# Altium PCB PCB1.PcbDoc
Units mil, origin at the board's own origin, x right, y up, seen from the top; angles counter-clockwise.
Board outline 3040 x 2075 mil, 2 copper layers (Top Layer, Bottom Layer); 60 components, 45 nets, 259 pads, 23 vias.
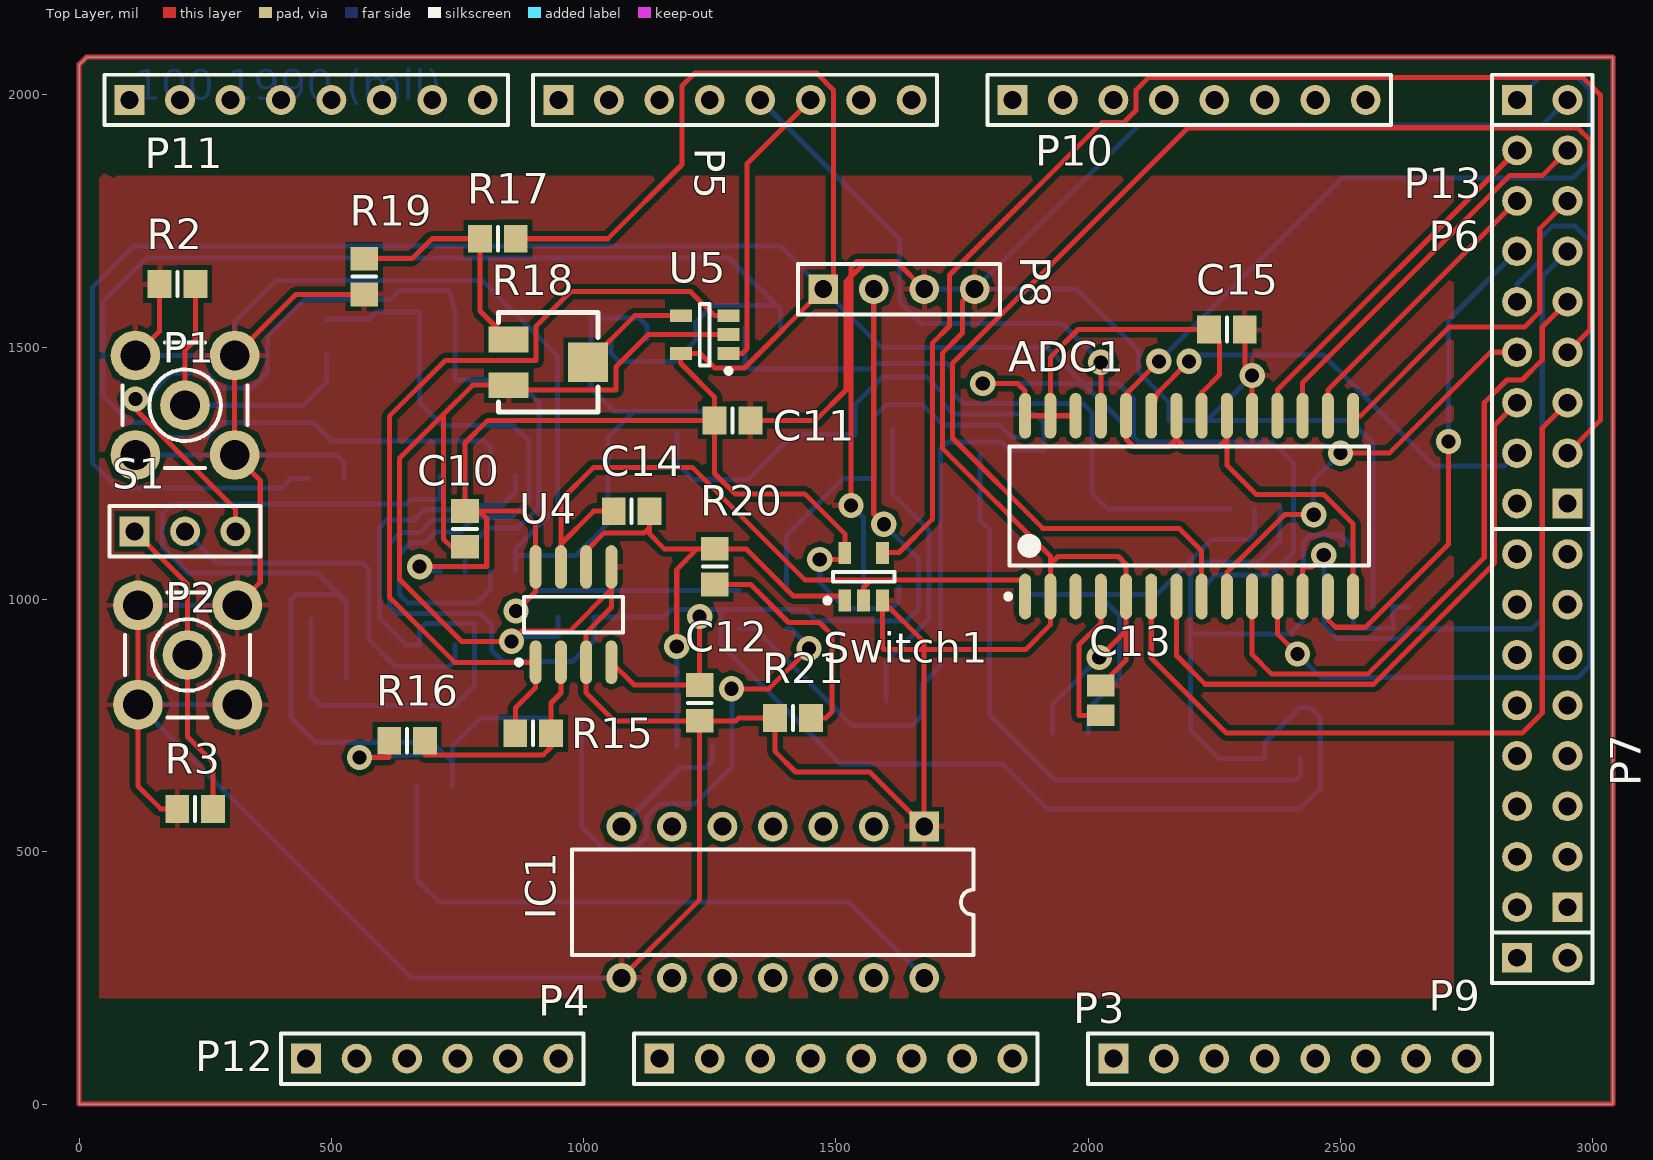
[diagram p0: Top Layer view]
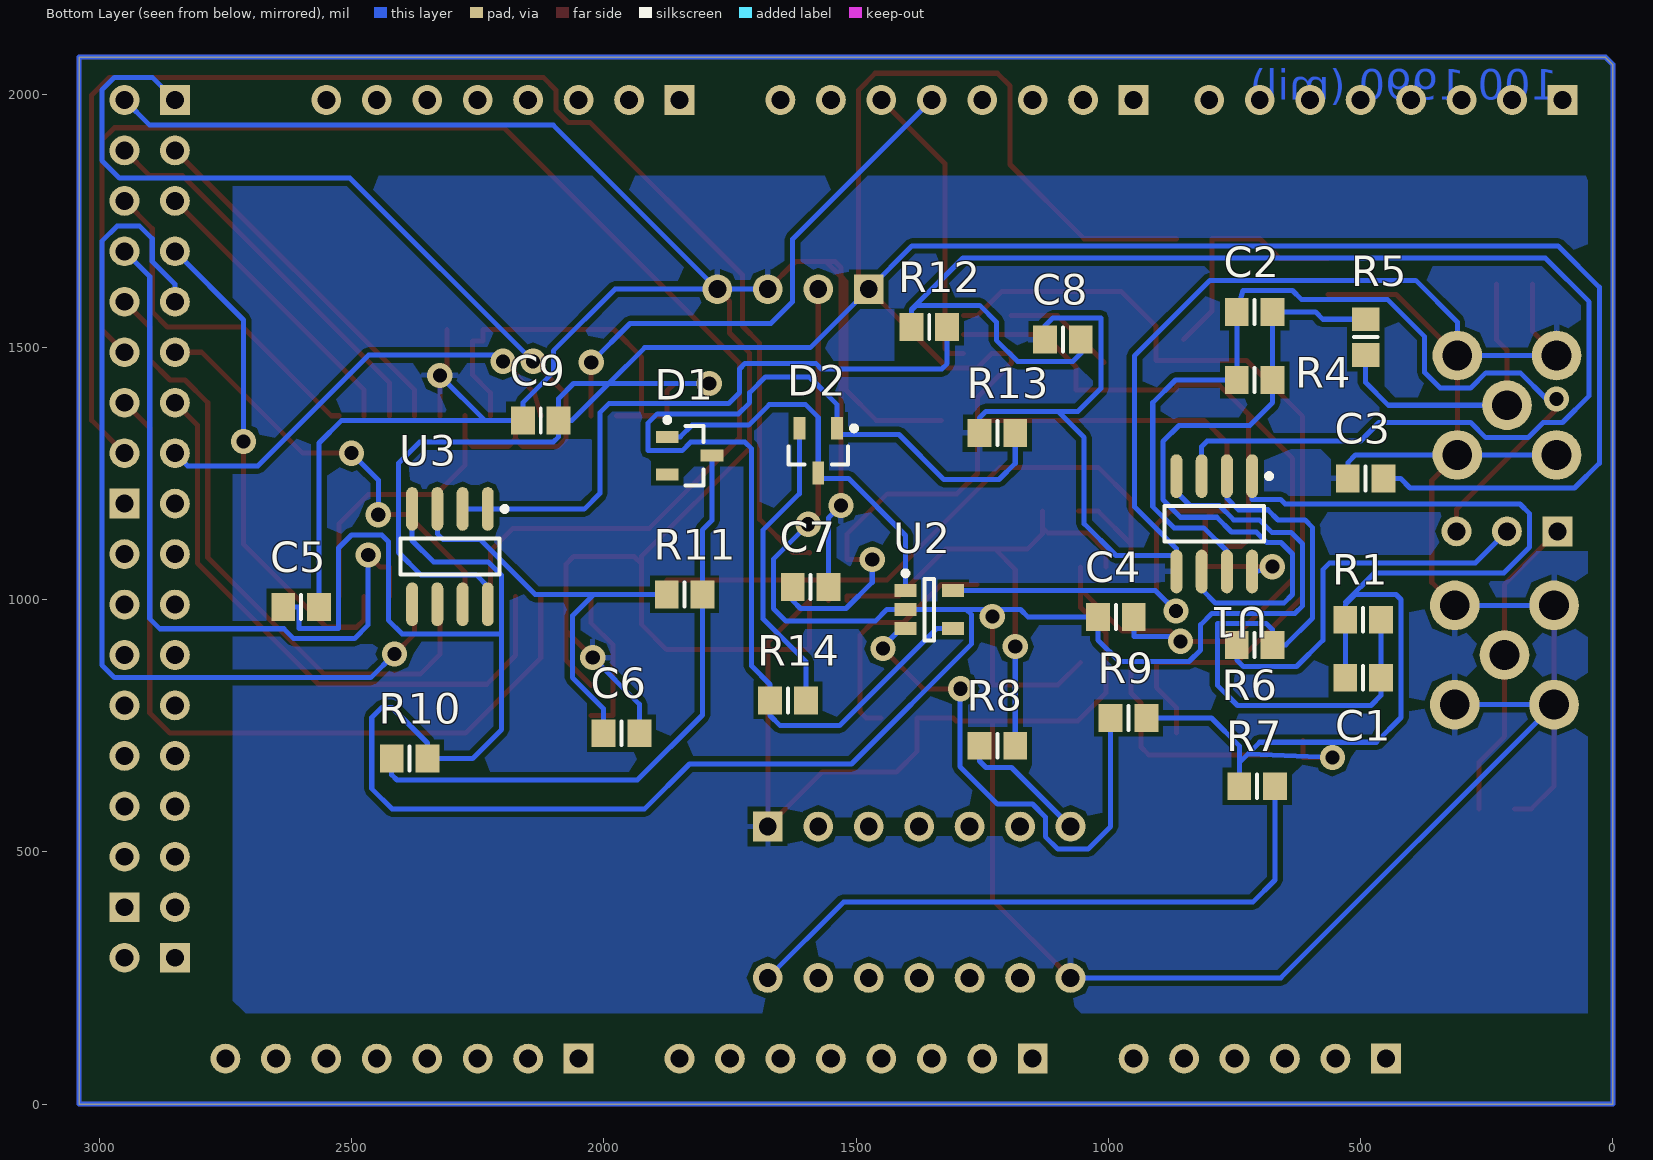
[diagram p1: Bottom Layer view, seen from below]

## Layer stack, top to bottom
Top Layer: signal copper 1.4
Dielectric: dielectric 12.6, FR-4, Dk 4.8
Bottom Layer: signal copper 1.4

## Board outline
0,0 0,2060 15,2075 3040,2075 3040,0

## Design rules (kind name [scope] priority, off if disabled: settings)
Clearance [All] p1: gap=10
PolygonConnect [All] p1: connectstyle=Relief reliefconductorwidth=10 reliefentries=4 polygonreliefangle="90 Angle"
RoomDefinition Sheet2 [InComponentClass('Sheet2')] p1: confinementstyle=ConfineIn formatcopy=TRUE lockcomponents=FALSE outline 0,0 3040,0 3040,2055 0,2055
RoomDefinition Sheet1 [InComponentClass('Sheet1')] p2: confinementstyle=ConfineIn formatcopy=TRUE lockcomponents=FALSE outline 0,0 3035,0 3035,2070 0,2070
RoutingTopology [InNetClass('digital')] p1: topology=Shortest
RoutingVias [All] p1: holewidth=28 width=50 viastyle="Through Hole" minholewidth=28 minwidth=50 maxholewidth=28 maxwidth=50
SilkscreenOverComponentPads [All] p1: minsilkscreentomaskgap=10
SolderMaskExpansion [All] p1: expansion=4
Width [All] p1: maxlimit=10 minlimit=10 preferedwidth=10
26 further rules are at their usual default settings.

## Classes and differential pairs
net class analog: NetADC1_1 NetADC1_4 NetC1_1 NetC1_2 NetC2_1 NetC2_2 NetC14_1 NetP1_1 NetP2_1 NetR6_1 NetR15_2 NetR17_2 NetR18_W
component class Sheet2: ADC1 C13 C14 C15 P3 P4 P5 P6 P7 P8 P9 P10 P11 P12 P13 R20 R21 Switch1
net class potencia: +5 -5 GND
net class digital: DGND NetADC1_6 NetADC1_7 NetADC1_8 NetADC1_9 NetADC1_10 NetADC1_11 NetADC1_12 NetADC1_13 NetADC1_15 NetADC1_16 NetADC1_17 NetADC1_18 NetADC1_23 NetADC1_25 NetP13_3
component class Sheet1: C1 C2 C3 C4 C5 C6 C7 C8 C9 C10 C11 C12 D1 D2 IC1 P1 P2 R1 R2 R3 R4 R5 R6 R7 R8 R9 R10 R11 R12 R13 R14 R15 R16 R17 R18 R19 S1 U1 U2 U3 U4 U5 V1 V2

## Components (designator, comment, footprint, x,y, rotation, side; value= is the part's Value field where it differs from the comment)
ADC1 "LTC1415" SO28_N 2200,1185 r90 top
C1 "Cap" 6-0805_N 495,845 r0 bottom
C2 "Cap" 6-0805_N 710,1570 r0 bottom
C3 "Cap" 6-0805_N 490,1240 r180 bottom
C4 "Cap" 6-0805_N 985,965 r180 bottom
C5 "Cap" 6-0805_N 2600,985 r180 bottom
C6 "Cap" 6-0805_N 1965,735 r180 bottom
C7 "Cap" 6-0805_N 1590,1025 r180 bottom
C8 "Cap" 6-0805_N 1090,1515 r0 bottom
C9 "Cap" 6-0805_N 2125,1355 r180 bottom
C10 "Cap" 6-0805_N 765,1140 r90 top
C11 "Cap" 6-0805_N 1295,1355 r0 top
C12 "Cap" 6-0805_N 1230,795 r270 top
C13 "Cap Pol3" C0805 2025,800 r90 top
C14 "Cap" 6-0805_N 1095,1175 r180 top
C15 "Cap" 6-0805_N 2275,1535 r0 top
D1 "Puente_Diodos" SOT-23B_N 1830,1285 r180 bottom
D2 "Puente_Diodos" SOT-23B_N 1575,1295 r270 bottom
IC1 "L33_134" DIP14 1375,400 r180 top
P1 "SMB" SMB_V-RJ45 210,1385 r0 top
P2 "SMB" SMB_V-RJ45 215,890 r0 top
P3 "Header 8" HDR1X8 2050,90 r0 top
P4 "Header 8" HDR1X8 1150,90 r0 top
P5 "Header 8" HDR1X8 950,1990 r0 top
P6 "Header 2" HDR1X2 2850,1990 r0 top
P7 "Header 8X2" HDR2X8 2950,390 r90 top
P8 "Header 4" HDR1X4 1475,1615 r0 top
P9 "Header 2" HDR1X2 2850,290 r0 top
P10 "Header 8" HDR1X8 1850,1990 r0 top
P11 "Header 8" HDR1X8 100,1990 r0 top
P12 "Header 6" HDR1X6 450,90 r0 top
P13 "Header 8X2" HDR2X8 2950,1190 r90 top
R1 "Res3" 6-0805_N 495,960 r0 bottom
R2 "Res3" 6-0805_N 195,1625 r0 top
R3 "Res3" 6-0805_N 230,585 r0 top
R4 "Res3" 6-0805_N 710,1435 r180 bottom
R5 "Res3" 6-0805_N 490,1520 r270 bottom
R6 "Res3" 6-0805_N 710,910 r180 bottom
R7 "Res3" 6-0805_N 705,630 r180 bottom
R8 "Res3" 6-0805_N 1220,710 r180 bottom
R9 "Res3" 6-0805_N 960,765 r180 bottom
R10 "Res3" 6-0805_N 2385,685 r180 bottom
R11 "Res3" 6-0805_N 1840,1010 r180 bottom
R12 "Res3" 6-0805_N 1355,1540 r180 bottom
R13 "Res3" 6-0805_N 1220,1330 r180 bottom
R14 "Res3" 6-0805_N 1635,800 r0 bottom
R15 "Res3" 6-0805_N 900,735 r180 top
R16 "Res3" 6-0805_N 650,720 r0 top
R17 "Res3" 6-0805_N 830,1715 r180 top
R18 "RPot SM" POT4MM-2 930,1470 r0 top
R19 "Res3" 6-0805_N 565,1640 r90 top
R20 "Res3" 6-0805_N 1260,1065 r90 top
R21 "Res3" 6-0805_N 1415,765 r0 top
S1 "SW-SPDT" HDR1X3 110,1135 r0 top
Switch1 "SN74LVC1G66DBVR" SOT23-5_N 1555,1045 r90 top
U1 "THS4062" S8_N 790,1150 r270 bottom
U2 "ADCMP600" SOT23-5_N 1355,980 r180 bottom
U3 "TL062CD" S8_N 2305,1085 r270 bottom
U4 "THS4062" S8_N 980,970 r90 top
U5 "ADCMP600" SOT23-5_N 1240,1525 r180 top

## Footprints (in the part's own frame and the unit in brackets; to place one, negate y for a bottom-side part, rotate by r counter-clockwise, add the part's x,y. Pads: shape width x height; smd on the part's side, far side on the other; paste and mask are expansions set on the pad)
6-0805_N [mm] "Chip Resistor, Body 2.0x1.2mm, IPC Medium Density"
  rect 1.2x1.4 smd: 1(-0.9,0) 2(0.9,0)
  silkscreen extent 0,-0.6 0,0.6, body extent -1.07,-0.7 1.07,0.7, height 0.7
C0805 [mm] "Chip Capacitor, Body 2.0x1.3mm, IPC High Density"
  rect 1.1x1.4 smd: 1(-0.75,0) 2(0.75,0)
  body extent -1.1,-0.72 1.1,0.72, height 1.4
DIP14 [mm] "DIP; 14 Leads; Row Spacing 7.62 mm; Pitch 2.54 mm"
  rect 1.5x1.5 hole 0.9: 1(-7.62,-3.81)
  round 1.5 hole 0.9: 2(-5.08,-3.81) 3(-2.54,-3.81) 4(0,-3.81) 5(2.54,-3.81) 6(5.08,-3.81) 7(7.62,-3.81) 8(7.62,3.81) 9(5.08,3.81) 10(2.54,3.81) 11(0,3.81) 12(-2.54,3.81) 13(-5.08,3.81) 14(-7.62,3.81)
  silkscreen extent -10.1,-2.65 10.1,2.65
HDR1X2 [mm] "Connector; Header; 2 Position"
  rect 1.5x1.5 hole 0.9: 1(0,0)
  round 1.5 hole 0.9: 2(2.54,0)
  silkscreen extent -1.27,-1.27 3.81,1.27
HDR1X3 [mm] "Connector; Header; 3 Position"
  rect 1.5x1.5 hole 0.9: 1(0,0)
  round 1.5 hole 0.9: 2(2.54,0) 3(5.08,0)
  silkscreen extent -1.27,-1.27 6.35,1.27
HDR1X4 [mm] "Connector; Header; 4 Position"
  rect 1.5x1.5 hole 0.9: 1(0,0)
  round 1.5 hole 0.9: 2(2.54,0) 3(5.08,0) 4(7.62,0)
  silkscreen extent -1.27,-1.27 8.89,1.27
HDR1X6 [mm] "Connector; Header; 6 Position"
  rect 1.5x1.5 hole 0.9: 1(0,0)
  round 1.5 hole 0.9: 2(2.54,0) 3(5.08,0) 4(7.62,0) 5(10.16,0) 6(12.7,0)
  silkscreen extent -1.27,-1.27 13.97,1.27
HDR1X8 [mm] "Connector; Header; 8 Position"
  rect 1.5x1.5 hole 0.9: 1(0,0)
  round 1.5 hole 0.9: 2(2.54,0) 3(5.08,0) 4(7.62,0) 5(10.16,0) 6(12.7,0) 7(15.24,0) 8(17.78,0)
  silkscreen extent -1.27,-1.27 19.05,1.27
HDR2X8 [mm] "Connector; Header; 8x2 Position"
  rect 1.5x1.5 hole 0.9: 1(0,0)
  round 1.5 hole 0.9: 2(0,2.54) 3(2.54,0) 4(2.54,2.54) 5(5.08,0) 6(5.08,2.54) 7(7.62,0) 8(7.62,2.54) 9(10.16,0) 10(10.16,2.54) 11(12.7,0) 12(12.7,2.54) 13(15.24,0) 14(15.24,2.54) 15(17.78,0) 16(17.78,2.54)
  silkscreen extent -1.27,-1.27 19.05,3.81
POT4MM-2 [mm] "Square Trimming Potentiometer"
  rect 2x1.3 smd: CCW(-2,-1.15) CW(-2,1.15)
  rect 2x2 smd: W(2,0)
  silkscreen extent -2.5,-2.5 2.5,2.5
S8_N [mm] "SOIC, 8-Leads, Body 4.9x3.9mm, Pitch 1.27mm, IPC Medium Density"
  oval 2.2x0.6 smd: 1(-2.4,1.905) 2(-2.4,0.635) 3(-2.4,-0.635) 4(-2.4,-1.905) 5(2.4,-1.905) 6(2.4,-0.635) 7(2.4,0.635) 8(2.4,1.905)
  silkscreen extent -2.52,-2.5 0.9,2.88, body extent -2,-2.5 2,2.5, height 1.76
SMB_V-RJ45 [mm] "Connector; SMB Straight"
  round 2.5 hole 1.5: 1(0,0) 2(-2.5,-2.5) 2(-2.5,2.5) 2(2.5,-2.5) 2(2.5,2.5)
  silkscreen extent -3.15,-3.15 3.15,3.15
SO28_N [mm] "28-Pin Plastic Small Outline Integrated Circuit 1.27 mm Pitch, IPC Medium Density"
  oval 2.3x0.6 smd: 1(-4.55,8.255) 2(-4.55,6.985) 3(-4.55,5.715) 4(-4.55,4.445) 5(-4.55,3.175) 6(-4.55,1.905) 7(-4.55,0.635) 8(-4.55,-0.635) 9(-4.55,-1.905) 10(-4.55,-3.175) 11(-4.55,-4.445) 12(-4.55,-5.715) 13(-4.55,-6.985) 14(-4.55,-8.255) 15(4.55,-8.255) 16(4.55,-6.985) 17(4.55,-5.715) 18(4.55,-4.445) 19(4.55,-3.175) 20(4.55,-1.905) 21(4.55,-0.635) 22(4.55,0.635) 23(4.55,1.905) 24(4.55,3.175) 25(4.55,4.445) 26(4.55,5.715) 27(4.55,6.985) 28(4.55,8.255)
  silkscreen extent -4.67,-9.05 3,9.23, body extent -3.8,-9.06 3.8,9.06, height 2.65
SOT23-5_N [mm] "SOT23, 5-Leads, Body 2.9x1.6mm, Pitch 0.95mm, Lead Span 2.8mm, IPC Medium Density"
  rect 1.1x0.65 smd: 1(-1.2,0.95) 2(-1.2,0) 3(-1.2,-0.95) 4(1.2,-0.95) 5(1.2,0.95)
  silkscreen extent -1.32,-1.55 0.25,1.95, body extent -0.9,-1.55 0.9,1.55, height 1.45
SOT-23B_N [mm] "SOT23, 3-Leads, Body 2.9x1.3mm, Pitch 0.95mm, Lead Span 2.4mm, IPC Medium Density"
  rect 1.15x0.6 smd: 1(-1.125,0.95) 2(-1.125,-0.95) 3(1.125,0)
  silkscreen extent -1.25,-1.5 0.7,1.92, body extent -0.7,-1.5 0.7,1.5, height 1.14

## Part data
C1 C2 C3 C4 C5 C6 C7 C8 C9 C10 C11 C12 C14 C15: "Capacitor"
C13: "Polarized Capacitor (Surface Mount)"
P1 P2: "SMB Straight Connector"
P3 P4 P5 P10 P11: "Header, 8-Pin"
P6 P9: "Header, 2-Pin"
P7 P13: "Header, 8-Pin, Dual row"
P8: "Header, 4-Pin"
P12: "Header, 6-Pin"
R1 R2 R3 R4 R5 R6 R7 R8 R9 R10 R11 R12 R13 R14 R15 R16 R17 R19 R20 R21: "Resistor"
R18: "Square Trimming Potentiometer"
S1: "SPDT Subminiature Toggle Switch, Right Angle Mounting, Vertical Actuation"
U1 U3 U4: library part LT1253CS8, "Low Cost Dual Video Amplifier"

## Via types
v1: diameter 50, hole 28, Top Layer to Bottom Layer, 23 vias

## Nets (pads, with @x,y where several pads share a name; then routed paths per layer and width w, separated by ;. In a path a pad name is that pad's centre, name@x,y a point inside that pad or via, vN(x,y) a via of type N, cw(c..) or ccw(c..) an arc to the next point about the centre after c; other vN are vias at no path point)
+5: ADC1.21 ADC1.26 ADC1.27 ADC1.28 C3.2 C7.1 C9.2 C10.2 C11.1 C15.1 P8.1 R17.1 Switch1.5 U1.8 U2.5 U3.8 U4.8 U5.5 | length 9391.8
  Top Layer w10: v1(675,1065) 808,1065 808,1160 792.57,1175.43 ; R17.1 1048,1715 1195,1862 1195,2018 1220,2043 1462,2043 1495,2010 1495,1635 P8.1 1319,1459 1259.6,1459 1231,1487.6 U5.5 1192,1468.57 1259.57,1401 C11.1 ; v1(866,977) 905,1016 U4.8 905,1148 877.57,1175.43 792.57,1175.43 ; v1(1468,1079) 1517.6,1079 Switch1.5 1517.6,1130 1438.17,1209.43 1300,1209.43 1259.57,1249.86 C11.1 ; v1(1791,1428) 1860,1428 1875,1413 ADC1.28 ADC1.27 ; ADC1.26 ADC1.27 ; ADC1.21 2225,1410 2260,1445 2260,1512 2239.57,1512 C15.1 1980,1535 1925,1480 ADC1.27 ; 792.57,1175.43 C10.2 765,1310 810,1355 C11.1
  Bottom Layer w10: C3.2 421,1240 402,1221 76,1221 27,1270 27,1619 109,1701 1389,1701 P8.1 1591,1499 1919,1499 1990,1428 ; v1(675,1065) 675,1058 U1.8 ; v1(866,977) 906.4,1017.4 U2.5 ; v1(1468,1079) 1468,1034 1520,982 1610,982 1625.43,997.43 C7.1 ; v1(1791,1428) 1990,1428 ; U3.8 2230,1025.82 2253,1048.82 2362.74,1048.82 2407,1093.08 2407,1270 2365,1312 2100,1312 2089.57,1322.43 C9.2 ; 1990,1428 2060,1428 2089.57,1398.43 C9.2 ; 1990,1428 2063,1355 C9.2
-5: C4.1 C5.1 C12.1 P8.2 R10.2 U1.4 U2.2 U3.4 U4.4 | length 5973.5
  Top Layer w10: U4.4 1100.08,830.43 C12.1 v1(1230,966) ; P8.2 1575,1169 v1(1595,1149)
  Bottom Layer w10: U1.4 865,1213 838.18,1186.18 780,1186.18 751.63,1157.81 700.81,1157.81 676,1133 638,1133 615,1110 615,987.56 630,972.56 794.44,972.56 817,950 817,900 840,877 978,877 1020.43,919.43 C4.1 1159,965 1174,980 v1@1244,980 ; v1(1230,966) v1@1244,980 ; v1(1595,1149) 1664.06,1079.94 1664.06,982 1639.06,957 1462,957 1439,980 U2.2 1281,980 ; U3.4 2380,1117 2337.11,1074.11 2229.11,1074.11 2203,1048 2203,932 ; C5.1 2604,985 2604,942.44 2525.94,942.44 2525.94,1102.06 2500,1128 2440,1128 2427,1115 2427,959 2400,932 2203,932 ; v1@1244,980 1281,980 ; 1281,980 1271,970 1271,912.28 1509.28,674 1830,674 1919,585 2420,585 2460,625 2460,766 2440,786 2420,786 2349.57,715.57 R10.2 2260,685 2203,742 2203,932
DGND: ADC1.14 ADC1.20 ADC1.22 ADC1.24 P6.1 | length 2326.1
  Top Layer w10: v1(2140,1472) 2075,1407 ADC1.24 2075,1318 2090,1303 2160,1303 2175,1318 ; ADC1.22 2175,1318 ; ADC1.20 2275,1318 ; ADC1.14 2525,1150 2467,1208 2333,1208 2275,1266 2275,1318 ; 2175,1318 2190,1303 2260,1303 2275,1318
  Bottom Layer w10: v1(2140,1472) 2503,1835 2960,1835 2995,1870 2995,2010 2970,2035 2895,2035 P6.1
GND: ADC1.2 ADC1.5 ADC1.19 C3.1 C4.2 C5.2 C6.2 C7.2 C8.2 C9.1 C10.1 C11.2 C12.2 C13.2 C15.2 IC1.1 IC1.8 P1.2 P2.2 P6.2 P8.3 P8.4 R2.1 R3.1 R13.1 R18.CCW R19.1 R21.1 Switch1.3 U1.5 U4.3 U4.5 U5.2 | length 16346
  Top Layer w10: P1.2@111.57,1483.43 159.57,1531.42 R2.1 ; P2.2@116.57,988.43 116.57,791.57 116.57,630 161.57,585 R3.1 ; P2.2@313.43,988.43 359,1034 359,1236 308.43,1286.57 308.43,1483.43 429.57,1604.57 R19.1 ; C10.1 737.43,1104.57 722,1120 722,1366.72 ; U4.5 1055,1020 ; IC1.8 1230,405 C12.2 ; U5.2 1128,1525 1064,1461 1064,1415 865,1415 865,1424.72 R18.CCW 780,1424.72 722,1366.72 ; C11.2 1460,1355 1520,1415 1520,1630 1530,1640 ; v1(1530,1186.43) 1530,1640 ; P8.3 1620,1670 1560,1670 ; P8.4 1751,1591 1751,1528 1711,1488 1711,1300 1925,1086 1925,1070 ; v1(2022,885) 2075,938 ; C13.2 2075,879.53 2075,938 ; C15.2 2310.43,1456.57 v1@2325,1442 ; ADC1.19 v1@2325,1442 ; v1(2325,1444) v1@2325,1442 ; 722,1366.72 635,1279.72 635,1040 758,917 v1(857,917) 877.2,937.2 972.2,937.2 1055,1020 ; 1055,1020 1055,984 1005,934 U4.3 1005,814.57 1060,759.57 C12.2 ; C12.2 1302,759.57 1307.43,765 R21.1 1379.57,698.43 1420,658 1567,658 IC1.1 1675,901 ; 1530,1640 1560,1670 ; 1530,1640 1530,1658 1542,1670 1560,1670 ; 1675,901 1876,901 1925,950 ADC1.2 1925,1070 ; 1675,901 1595,901 1592.4,903.6 Switch1.3 1675,915.16 1675,901 ; 1925,1070 1940,1085 2060,1085 2075,1070 ADC1.5 2075,938
  Bottom Layer w10: P1.2@111.57,1286.57 308.43,1286.57 510,1286.57 525.43,1271.14 C3.1 ; P1.2@111.57,1483.43 308.43,1483.43 308.43,1550 390.99,1632.56 798.44,1632.56 948,1483 948,1183.77 865,1100.77 U1.5@865,1087 ; P2.2@116.57,988.43 P2.2@313.43,988.43 ; P2.2@313.43,791.57 116.57,791.57 658.15,250 IC1.8 ; v1(857,917) 867,927 949.57,927 C4.2 ; U1.5 U1.5@865,1087 ; C8.2 1125.43,1542.57 1110,1558 1015,1558 1015,1418 1060,1373 1100,1373 ; R13.1 1255.43,1360 1242.43,1373 1100,1373 ; v1(1530,1186.43) 1554.57,1161.87 C7.2 ; P8.3 P8.4 ; C6.2 1929.57,792.57 v1(2022,885) ; v1(2325,1444) 2236,1355 ; C5.2 2564.57,1310 2519.57,1355 2236,1355 ; P6.2 2900,1940 2100,1940 P8.4 ; U1.5@865,1087 985,1087 1048,1150 1048,1321 1100,1373 ; P8.4 1977.87,1615 2100,1492.87 2100,1450.43 2160.43,1390 C9.1 2236,1355
NetADC1_1: ADC1.1 C14.2 Switch1.2 U4.7 | length 1383.7
  Top Layer w10: U4.7 955,1110 ; C14.2 1020,1175 955,1110 ; Switch1.2 1555,1023.91 1570,1038.91 ; ADC1.1 1875,1038.91 1570,1038.91 ; 955,1110 955,1197 1020,1262 1215.24,1262 1438.33,1038.91 1570,1038.91
NetADC1_4: ADC1.4 C13.1 | length 296.2
  Top Layer w10: C13.1 1982,770.47 1982,910 2025,953 ADC1.4
NetADC1_6: ADC1.6 P13.5 | length 1610.9
  Top Layer w10: ADC1.6 2125,884 2274,735 2860,735 2900,775 2900,1340 P13.5
NetADC1_7: ADC1.7 P13.6 | length 1206.8
  Top Layer w10: ADC1.7 2175,889 2232,832 2565.47,832 2805.47,1072 2805.47,1345.47 P13.6
NetADC1_8: ADC1.8 P13.7 | length 2731.4
  Top Layer w10: ADC1.8 2225,1096 2180,1141 1910,1141 1731,1320 1731,1468 2198,1935 2970,1935 2995,1910 2995,1535 P13.7
NetADC1_9: ADC1.9 P13.8 | length 844.2
  Top Layer w10: ADC1.9 2275,1054 2389,1168 v1(2447,1168) ; v1(2500,1290) 2597,1290 2797,1490 P13.8
  Bottom Layer w10: v1(2447,1168) 2447,1237 v1(2500,1290)
NetADC1_10: ADC1.10 P13.9 | length 1279.6
  Top Layer w10: ADC1.10 2325,891 2364,852 2554,852 2785,1083 2785,1390 2830,1435 2860,1435 2900,1475 2900,1540 P13.9
NetADC1_11: ADC1.11 P13.10 | length 1846.7
  Top Layer w10: ADC1.11 2375,932 v1(2415,892)
  Bottom Layer w10: v1(2415,892) 2462,845 2970,845 2995,870 2995,1710 2965,1740 2920,1740 2895,1715 2895,1670 2850,1625 P13.10
NetADC1_12: ADC1.12 P13.11 | length 1457.8
  Top Layer w10: ADC1.12 2425,1064 2443,1064 v1(2467,1088)
  Bottom Layer w10: v1(2467,1088) 2467,949.7 2494.26,922.44 2614.75,922.44 2634.31,942 2880,942 2900,962 2900,1640 P13.11
NetADC1_13: ADC1.13 P13.12 | length 996.1
  Top Layer w10: ADC1.13 2475,960 2490,945 2549.66,945 2714,1109.34 v1(2714,1313)
  Bottom Layer w10: v1(2714,1313) 2714,1554 P13.12
NetADC1_15: ADC1.15 P13.13 | length 698.1
  Top Layer w10: ADC1.15 2540,1364.13 2715.87,1540 2865,1540 2895,1570 2895,1735 P13.13
NetADC1_16: ADC1.16 P13.14 | length 581.2
  Top Layer w10: ADC1.16 2475,1415 P13.14
NetADC1_17: ADC1.17 P13.15 | length 781.4
  Top Layer w10: ADC1.17 2425,1430 2835,1840 2900,1840 P13.15
NetADC1_18: ADC1.18 P13.16 | length 722.6
  Top Layer w10: ADC1.18 2375,1415 P13.16
NetADC1_23: ADC1.23 P13.4 | length 892
  Top Layer w10: ADC1.23 2138,1410 v1(2200,1472)
  Bottom Layer w10: v1(2200,1472) 2212.41,1484.41 2466.02,1484.41 2685.71,1264.71 2824.71,1264.71 P13.4
NetADC1_25: ADC1.25 P5.5 | length 1068.9
  Top Layer w10: ADC1.25 v1(2025,1470)
  Bottom Layer w10: P5.5 1626,1714 1626,1590 1669,1547 1948,1547 v1(2025,1470)
NetC1_1: C1.1 R1.1 R6.2 U1.2 | length 1285.5
  Bottom Layer w10: R1.1 C1.1 459.57,810 479.57,790 744.06,790 784.06,830 784.06,952.56 687.13,952.56 674.57,940 R6.2 648.19,910 595,963.19 595,1142.42 610,1157.42 663.6,1157.42 683.99,1177.81 742.38,1177.81 765,1200.43 U1.2
NetC1_2: C1.2 R1.2 R7.1 R9.2 R16.1 U1.1 | length 2493
  Top Layer w10: v1(556,687) 614.57,687 R16.1
  Bottom Layer w10: C1.2 R1.2 530.43,990 528.15,992.28 ; v1(556,687) 723,694 ; U1.1 715,1198 658.37,1198 649.68,1189.31 184.31,1189.31 165,1170 165,1104 216.36,1052.64 472.36,1052.64 530.43,994.57 528.15,992.28 ; R7.1 740.43,676.57 ; R9.2 795.43,765 740.43,710 740.43,676.57 ; 528.15,992.28 510.43,1010 430,1010 420,1000 420,766 469,717 700,717 723,694 ; 723,694 740.43,676.57
NetC2_1: C2.1 R4.2 R5.1 U1.6 | length 1350.7
  Bottom Layer w10: R5.1 575,1555.43 589.57,1570 C2.1 R4.2 674.57,1390 719.57,1345 860,1345 892,1313 892,1198 857,1163 785.11,1163 755.93,1133.82 706.82,1133.82 686,1113 658,1113 635,1090 635,1010 652.39,992.61 787.61,992.61 815,1020 U1.6
NetC2_2: C2.2 R4.1 S1.3 U1.7 | length 1916
  Top Layer w10: v1(111.57,1397.39) 111.57,1377.39 310,1178.96 S1.3
  Bottom Layer w10: v1(111.57,1397.39) 131.57,1397.39 183.4,1449.21 251.83,1449.21 281.83,1419.21 342.21,1419.21 373,1450 373,1521 447,1595 617.44,1595 635,1612.56 732.87,1612.56 C2.2 745.43,1502 R4.1 867,1435 912,1390 912,1184 870,1142 811,1142 765,1096 U1.7
NetC6_1: C6.1 R11.1 U3.3 | length 871.7
  Bottom Layer w10: R11.1 2020,1010 ; C6.1 2000.43,783.43 2062,845 2062,968 2020,1010 ; U3.3 2330,1130 2318.53,1118.53 2244.53,1118.53 2136,1010 2020,1010
NetC8_1: C8.1 R12.1 U1.3 | length 2977
  Bottom Layer w10: U1.3 815,1303 804,1314 500.37,1314 463.58,1350.79 281.83,1350.79 251.83,1320.79 168.17,1320.79 138.17,1350.79 100,1350.79 47,1403.79 47,1590 134,1677 1288,1677 1390.43,1574.57 1390.43,1572.57 ; C8.1 1054.57,1487.43 1070,1472 1180,1472 1222,1514 1222,1550 1255,1583 1380,1583 1390.43,1572.57 ; R12.1 1390.43,1572.57
NetC14_1: C14.1 R8.2 R20.2 Switch1.1 U4.6 | length 1075.9
  Top Layer w10: U4.6 1005,1096 1041,1132 1120,1132 1130.43,1142.43 ; C14.1 1130.43,1142.43 ; v1(1184.57,906.57) 1184.57,1059.57 1225.43,1100.43 ; Switch1.1 1517.6,1007 1415.43,1007 1322,1100.43 R20.2 1225.43,1100.43 ; 1130.43,1142.43 1130.43,1130 1160,1100.43 1225.43,1100.43
  Bottom Layer w10: R8.2 v1(1184.57,906.57)
NetD1_1: D1.1 D2.3 U2.1 | length 786.7
  Bottom Layer w10: U2.1 1402,1017.4 1402,1126.89 1515.11,1240 1575,1240 D2.3 1575,1361.1 1600,1386.1 1672.35,1386.1 1713,1345.45 1825.34,1345.45 1848.39,1322.4 D1.1
NetD1_3: D1.3 R10.1 R11.2 | length 1228
  Bottom Layer w10: D1.3 1785.71,1156.86 1804.57,1138 R11.2 1804.57,771 1933.57,642 2410,642 2420.43,652.43 R10.1
NetD2_1: D2.1 R13.2 R14.2 U2.4 | length 2235.9
  Bottom Layer w10: R13.2 1184.57,1270 1216.57,1238 1326,1238 1415,1327 1537.6,1327 D2.1 1537.6,1386.11 1592.49,1441 1680,1441 1711,1410 1711,1390 1733,1368 1894,1368 1912,1350 1912,1295 1844.81,1295 1828,1311.81 1720,1311.81 1707,1298.81 1707,868 1670.43,831.43 R14.2 1670.43,770 1650.43,750 1533,750 1340.4,942.6 U2.4
NetD2_2: D2.2 R14.1 | length 604
  Bottom Layer w10: R14.1 1599.57,877 1684.06,961.49 1684.06,1137.94 1612.4,1209.6 D2.2
NetIC1_7: IC1.7 R8.1 | length 264.3
  Bottom Layer w10: IC1.7 1192,667 1242.43,667 1255.43,680 R8.1
NetIC1_14: IC1.14 R7.2 | length 1271.8
  Bottom Layer w10: R7.2 669.57,444 713.57,400 1525,400 IC1.14
NetP1_1: P1.1 R2.2 R5.2 | length 601.7
  Top Layer w10: P1.1 210,1494 230.43,1514.43 R2.2
  Bottom Layer w10: P1.1 445,1385 490,1430 R5.2
NetP2_1: P2.1 R3.2 S1.1 | length 614.4
  Top Layer w10: S1.1 215,1030 P2.1 215,728 265.43,677.57 R3.2
NetP5_6: P5.6 U5.1 | length 585.8
  Top Layer w10: U5.1 1314.6,1487.6 1324,1497 1324,1864 P5.6
NetP13_3: P13.3 Switch1.4 | length 2852.1
  Top Layer w10: Switch1.4 1592.4,1093 1625.21,1093 1691,1158.79 1691,1508 1725,1542 1725,1643 2027,1945 2070,1945 2095,1970 2095,2010 2120,2035 2980,2035 3015,2000 3015,1355 P13.3
NetR6_1: R6.1 S1.2 | length 763.8
  Bottom Layer w10: S1.2 272.36,1072.64 561.36,1072.64 575,1059 575,919 627,867 732.43,867 745.43,880 R6.1
NetR9_1: R9.1 U2.3 | length 1027.8
  Top Layer w10: v1(1293,823) 1367,823 v1(1446.6,902.6)
  Bottom Layer w10: R9.1 995.43,550 1040.43,505 1100,505 1125,530 1125,569 1150.53,594.53 1220,594.53 1294.06,668.59 1294.06,821.94 v1(1293,823) ; U2.3 1411,942.6 1446.6,907 v1(1446.6,902.6)
NetR12_2: R12.2 U3.1 U3.2 | length 1283.4
  Bottom Layer w10: R12.2 1319.57,1467.43 1330,1457 1569,1457 1580,1468 1720,1468 1731,1457 1731,1410 1753,1388 1990.07,1388 2008,1370.07 2008,1210 2039,1179 2230,1179 U3.1 U3.2
NetR15_1: R15.1 R16.2 U4.2 | length 460.6
  Top Layer w10: R16.2 685.43,692 920,692 935.43,707.43 R15.1 935.43,795 955,814.57 U4.2
NetR15_2: R15.2 U4.1 U5.3 | length 1693
  Top Layer w10: R15.2 864.57,785 905,825.43 U4.1 744.49,875.51 615,1005 615,1363 726,1474 906,1474 906,1542 974,1610 1212,1610 1259.6,1562.4 U5.3
NetR17_2: R17.2 R18.CW R19.2 | length 469.2
  Top Layer w10: R19.2 660,1675.43 699.57,1715 R17.2 794.57,1571.97 R18.CW
NetR18_W: R18.W U5.4 | length 222.3
  Top Layer w10: R18.W 1101.14,1562.4 U5.4
NetR20_1: R20.1 R21.2 | length 472.6
  Top Layer w10: R20.1 1331,1029.57 1406.19,954.38 1467.52,954.38 1491.9,930 1491.9,776.9 1480,765 R21.2
pads on no net: ADC1.3 D1.2 IC1.2 IC1.3 IC1.4 IC1.5 IC1.6 IC1.9 IC1.10 IC1.11 IC1.12 IC1.13 P3.1 P3.2 P3.3 P3.4 P3.5 P3.6 P3.7 P3.8 P4.1 P4.2 P4.3 P4.4 P4.5 P4.6 P4.7 P4.8 P5.1 P5.2 P5.3 P5.4 P5.7 P5.8 P7.1 P7.2 P7.3 P7.4 P7.5 P7.6 P7.7 P7.8 P7.9 P7.10 P7.11 P7.12 P7.13 P7.14 P7.15 P7.16 P9.1 P9.2 P10.1 P10.2 P10.3 P10.4 P10.5 P10.6 P10.7 P10.8 P11.1 P11.2 P11.3 P11.4 P11.5 P11.6 P11.7 P11.8 P12.1 P12.2 P12.3 P12.4 P12.5 P12.6 P13.1 P13.2 U3.5 U3.6 U3.7
copper on no net: | length 40
  Bottom Layer w10: 90,1990 110,1990 ; 100,1980 100,2000

## Polygon pours and split planes (outlines as drawn)
GND on Top Layer "Top Layer-No Net" (solid, pour order 4): 70,1835 75,1840 2725,1840 2725,230 2705,210 40,210 40,1835 45,1840 40,1835 40,1830 40,1835 50,1845
GND on Bottom Layer "Top Layer-No Net" (solid, pour order 6): 40,1840.04 50.04,1830.07 50.04,180 2709.91,180 2714.93,184.99 2735,204.93 2735,1845.03 2735,1850.01 2729.98,1855 2729.98,1845.03 2735,1840.04

## Other copper
Bottom Layer:
  text "100,1990 (mil)" at 110,1990 h60
Multi-Layer:
  the board outline again, w10